# EAGLE board final (EAGLE 9.6.2)
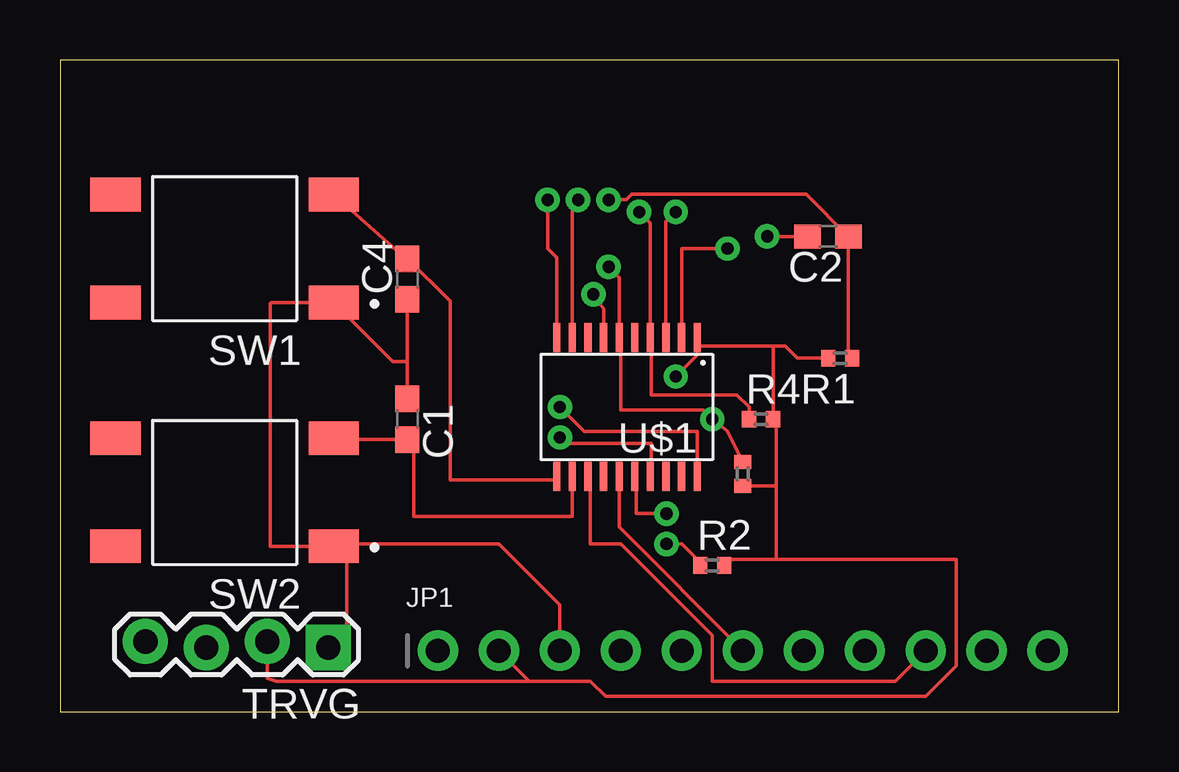
[diagram p0: board, top side]
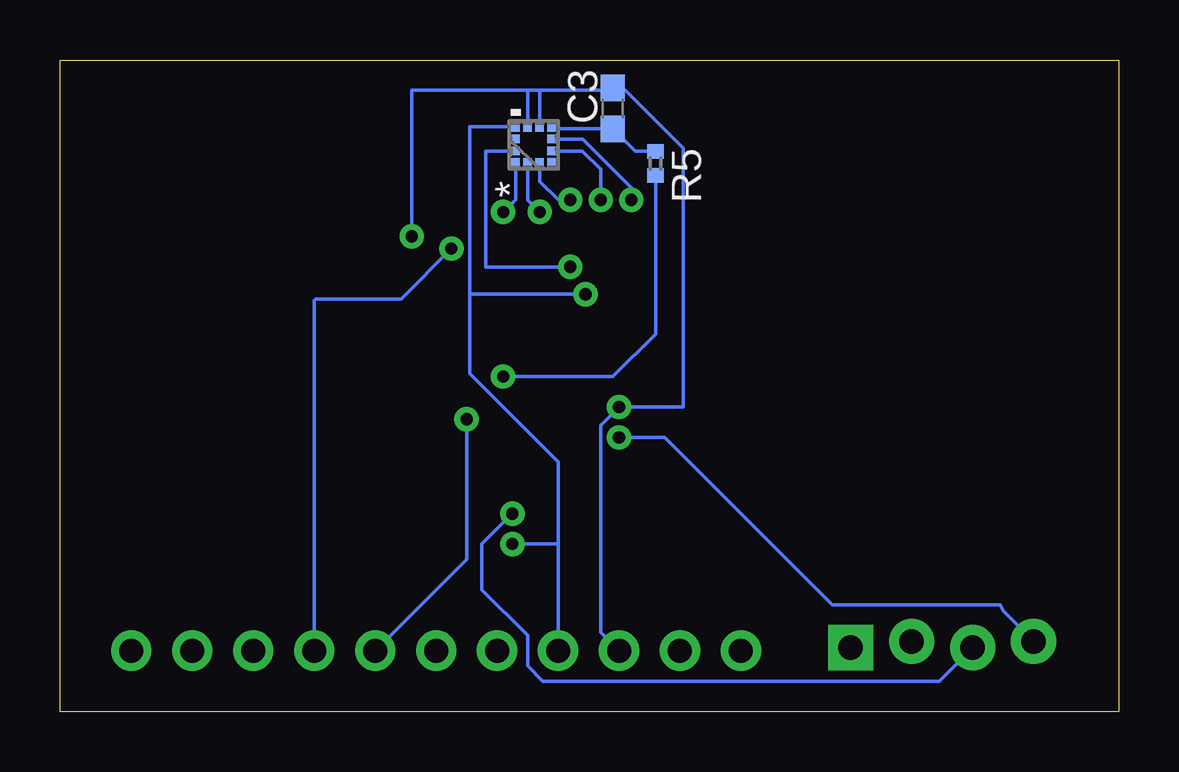
[diagram p1: board, bottom side, seen from below]

Size 44.12 x 27.17 mm. Coordinates in mm from the lower left corner, seen from the top.
Outline: 0,0 44.12,0 44.12,27.17 0,27.17 0,0
Copper layers (1*16): Top 0.035mm / dielectric 1.5mm / Bottom 0.035mm
Design rules "AdvancedCircuitsBarebones": minimum track width 6mil, minimum drill 20mil, track to track 6mil, track to pad 6mil, pad to pad 6mil, via to via 6mil, smd to smd 6mil, copper to edge 10mil, drill to drill 6mil, minimum pad ring 12mil, minimum via ring 10mil, stop-mask expansion 4mil, vias tented up to drill 25mil, thermal gap 10mil

## Footprints (pad centres in the part's own frame; a part is rotated, then mirrored left to right if it is on the bottom)
C0603 = smd 1.1 x 1: 1 -0.85,0; 2 0.85,0
1X11_ROUND = drill 1 pad 1.676: 1 -12.7,0; 2 -10.16,0; 3 -7.62,0; 4 -5.08,0; 5 -2.54,0; 6 0,0; 7 2.54,0; 8 5.08,0; 9 7.62,0; 10 10.16,0; 11 12.7,0
R0402 = smd 0.6 x 0.7: 1 -0.5,0; 2 0.5,0
SW_1571563-4 = smd 2.1 x 1.4: 1 -4.55,2.25; 2 4.55,2.25; 3 -4.55,-2.25; 4 4.55,-2.25
1X04_LOCK = drill 1.016 pad 1.88 square: 1 0,0.127 | drill 1.016 pad 1.88: 2 2.54,-0.127; 3 5.08,0.127; 4 7.62,-0.127
LGA12_2X2X0P9_KNX-M = smd 0.432 x 0.356: 1 -0.762,0.75; 2 -0.762,0.25; 3 -0.762,-0.25; 4 -0.762,-0.75; 7 0.762,-0.75; 8 0.762,-0.25; 9 0.762,0.25; 10 0.762,0.75 | smd 0.356 x 0.432: 5 -0.25,-0.787; 6 0.25,-0.787; 11 0.25,0.787; 12 -0.25,0.787
PW20 = smd 0.3 x 1.2: 1 -2.925,-2.9; 2 -2.275,-2.9; 3 -1.625,-2.9; 4 -0.975,-2.9; 5 -0.325,-2.9; 6 0.325,-2.9; 7 0.975,-2.9; 8 1.625,-2.9; 9 2.275,-2.9; 10 2.925,-2.9; 11 2.925,2.9; 12 2.275,2.9; 13 1.625,2.9; 14 0.975,2.9; 15 0.325,2.9; 16 -0.325,2.9; 17 -0.975,2.9; 18 -1.625,2.9; 19 -2.275,2.9; 20 -2.925,2.9

## Placement (x,y rotation side)
C1  47nF  [C0603]  14.48,12.19 270 top
C2  0.1u  [C0603]  32,19.81 180 top
C3  0.1u  [C0603]  21.08,25.15 90 bottom
C4  47nF  [C0603]  14.48,18.03 90 top
JP1  [1X11_ROUND]  28.45,2.54 0 top
R1  1k  [R0402]  32.51,14.73 180 top
R2  4.7k  [R0402]  27.18,6.1 0 top
R3  2.2k  [R0402]  28.45,9.91 270 top
R4  2.2k  [R0402]  29.21,12.19 0 top
R5  1k  [R0402]  19.3,22.86 270 bottom
SW1  SWITCH_SPSTSMD  [SW_1571563-4]  6.86,19.3 180 top
SW2  SWITCH_SPSTSMD  [SW_1571563-4]  6.86,9.14 180 top
TRVG  [1X04_LOCK]  11.18,2.79 180 top
U1  KX126-1063LGA12_2X2X0P9_KNX-M  [LGA12_2X2X0P9_KNX-M]  24.38,23.62 90 bottom
U$1  MSP430G2XX3TSSOP  [PW20]  23.62,12.7 180 top

## Library data of the parts
C1-C4 = rcl; SPICEPREFIX: C
JP1 = microbuilder
R1-R5 = rcl; SPICEPREFIX: R
SW1 SW2 U$1 = ELEC327
TRVG = Pendant
U1 = Juan_pedometer; COPYRIGHT: Copyright (C) 2021 Ultra Librarian. All rights reserved.; DIGI-KEY_PART_NUMBER_1: 1191-1058-2-ND; DIGI-KEY_PART_NUMBER_2: 1191-1058-1-ND; DIGI-KEY_PART_NUMBER_3: 1191-1058-6-ND; MANUFACTURER_PART_NUMBER: KX126-1063; MFR_NAME: Kionix

## Nets
BUT0: C4.2 SW1.3 U$1.11
BUT1: C1.2 SW2.3 U$1.12
D_CLK: JP1.4 R2.1 U1.10 U$1.7
D_RST: JP1.8 U$1.2
D_SIMO: JP1.6 U$1.15
DC: JP1.9 U$1.13
GND: C1.1 C2.2 C3.2 C4.1 JP1.3 SW1.1 SW2.1 TRVG.1 U1.8 U1.9 U$1.20
INT1: U1.5 U$1.9
INT2: U1.6 U$1.10
IO_VDD: C2.1 R1.1 U1.3
P_CLK: JP1.7 R3.1 U1.12 U$1.6
P_SIMO: R4.1 U1.2 U$1.4
P_SOMI: U1.1 U$1.3
P_VDD: C3.1 R5.1 U1.7
RST: TRVG.3 U$1.16
TEST: TRVG.4 U$1.17
VDD: JP1.2 R1.2 R2.2 R3.2 R4.2 R5.2 TRVG.2 U$1.1

## Tracks (layer width: path | path; a pad name or v marks a point on that pad's centre or on a via)
BUT0
  Top 0.152: SW1.3 14.22,19.05 14.48,19.05 C4.2 16.26,17.11 16.26,9.65 20.55,9.65 U$1.11
BUT1
  Top 0.152: U$1.12 21.35,8.14 21.34,8.13 14.73,8.13 14.73,11.09 C1.2 11.46,11.34 SW2.3
D_CLK  (via drill 0.51)
  Top 0.152: v25.27,6.99 25.91,6.99 26.54,6.35 R2.1 | v22.23,17.4 22.65,16.79 U$1.7
  Bottom 0.152: U1.10 27.05,24.38 27.05,17.4 | 27.05,17.4 27.05,14.1 23.37,10.41 23.37,6.99 | JP1.4 23.37,6.99 | 23.37,6.99 v25.27,6.99 | 27.05,17.4 v22.23,17.4
D_RST  (via drill 0.51)
  Top 0.152: v27.81,19.3 25.91,19.3 25.91,18.67 25.9,18.39 U$1.2
  Bottom 0.152: v27.81,19.3 29.91,17.21 33.47,17.21 33.53,17.14 JP1.8
D_SIMO
  Top 0.152: U$1.15 23.3,7.69 JP1.6
DC
  Top 0.152: JP1.9 34.8,1.27 27.18,1.27 27.18,3.17 23.37,6.99 22.1,6.99 22.1,9.53 U$1.13
GND  (via drill 0.51)
  Top 0.152: SW2.1 11.94,6.35 11.94,3.43 TRVG.1 | SW2.1 11.94,6.99 18.29,6.99 20.83,4.45 JP1.3 | SW2.1 8.76,6.89 8.76,17.02 8.8,17.05 SW1.1 13.86,14.61 14.48,14.61 | C1.1 14.48,14.61 | v20.83,12.7 21.84,11.68 26.55,11.68 U$1.20 | C4.1 14.48,14.61 | C2.2 v29.46,19.81
  Bottom 0.152: JP1.3 21.59,3.3 21.59,11.94 v20.83,12.7 18.16,12.7 18.16,23.5 20.57,25.91 21.08,25.91 | U1.9 24.63,25.14 24.64,25.15 24.64,25.91 | 24.13,25.91 21.08,25.91 | 24.13,25.91 24.13,25.9 U1.8 | 24.13,25.91 24.64,25.91 | C3.2 21.08,25.91 | 24.64,25.91 29.46,25.91 v29.46,19.81
INT1  (via drill 0.51)
  Top 0.152: U$1.9 21.35,21.09 v21.59,21.34
  Bottom 0.152: U1.5 22.35,23.37 21.59,22.61 v21.59,21.34
INT2  (via drill 0.51)
  Top 0.152: U$1.10 20.7,18.93 20.32,19.3 v20.32,21.34
  Bottom 0.152: U1.6 22.35,23.87 20.32,21.84 v20.32,21.34
IO_VDD  (via drill 0.51)
  Top 0.152: R1.1 32.85,14.89 C2.1 31.1,21.57 23.82,21.57 23.6,21.34 v22.86,21.34
  Bottom 0.152: U1.3 24.13,22.1 23.37,21.34 v22.86,21.34
P_CLK  (via drill 0.51)
  Top 0.152: R3.1 27.81,11.71 v27.18,12.19 26.8,12.57 23.37,12.57 23.37,15.53 U$1.6 23.3,18.11 v22.86,18.54
  Bottom 0.152: JP1.7 27.18,6.35 v27.18,12.19 | U1.12 26.39,23.37 26.39,18.54 v22.86,18.54
P_SIMO  (via drill 0.51)
  Top 0.152: v24.13,20.83 24.6,20.36 U$1.4 24.64,15.56 24.64,13.21 28.19,13.21 28.71,12.69 R4.1
  Bottom 0.152: U1.2 24.63,21.33 v24.13,20.83
P_SOMI  (via drill 0.51)
  Top 0.152: U$1.3 25.25,20.42 v25.65,20.83
  Bottom 0.152: U1.1 25.13,21.35 v25.65,20.83
P_VDD
  Bottom 0.152: U1.7 23.55,24.3 C3.1 20.15,23.36 R5.1
RST  (via drill 0.51)
  Top 0.152: v25.27,8.26 24,8.26 24,9.53 U$1.16
  Bottom 0.152: v25.27,8.26 26.54,6.99 26.54,5.08 24.64,3.17 24.64,1.91 24,1.27 7.49,1.27 TRVG.3
TEST  (via drill 0.51)
  Top 0.152: v20.83,11.43 21.08,11.18 24.64,11.18 24.64,10.16 U$1.17
  Bottom 0.152: v20.83,11.43 18.92,11.43 11.94,4.45 4.95,4.45 4.83,4.19 TRVG.4
VDD  (via drill 0.51)
  Top 0.152: 19.56,1.27 22.1,1.27 22.73,0.64 36.07,0.64 37.34,1.91 37.34,6.35 29.84,6.35 | JP1.2 19.56,1.27 | 19.56,1.27 9.02,1.27 8.64,1.4 TRVG.2 | 29.84,9.41 29.84,12.19 R4.2 29.72,15.24 | 29.84,9.41 29.84,6.35 | R1.2 30.73,14.73 30.22,15.24 29.72,15.24 | 29.72,15.24 26.54,15.24 U$1.1 26.55,14.86 v25.65,13.97 | 29.84,6.35 27.81,6.35 R2.2 | R3.2 29.84,9.41
  Bottom 0.152: R5.2 19.3,15.75 21.08,13.97 v25.65,13.97